# EAGLE board relaym11.7 (EAGLE 5.06)
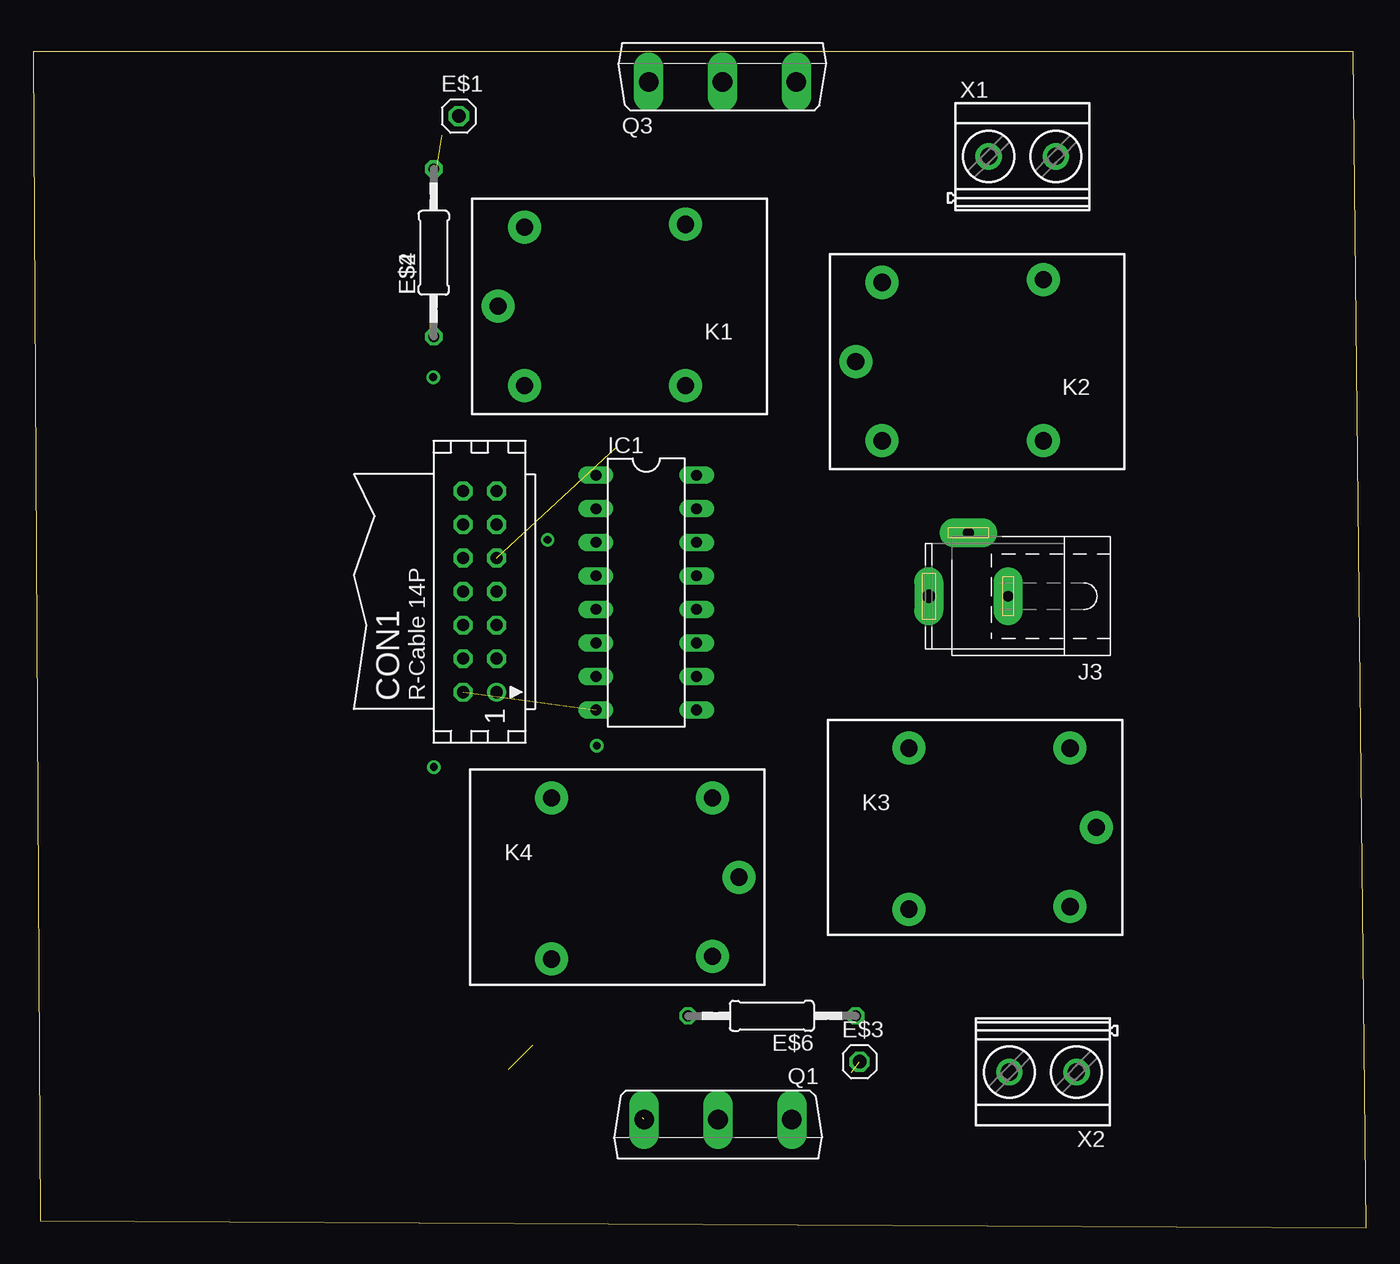
[diagram p0: board, top side]
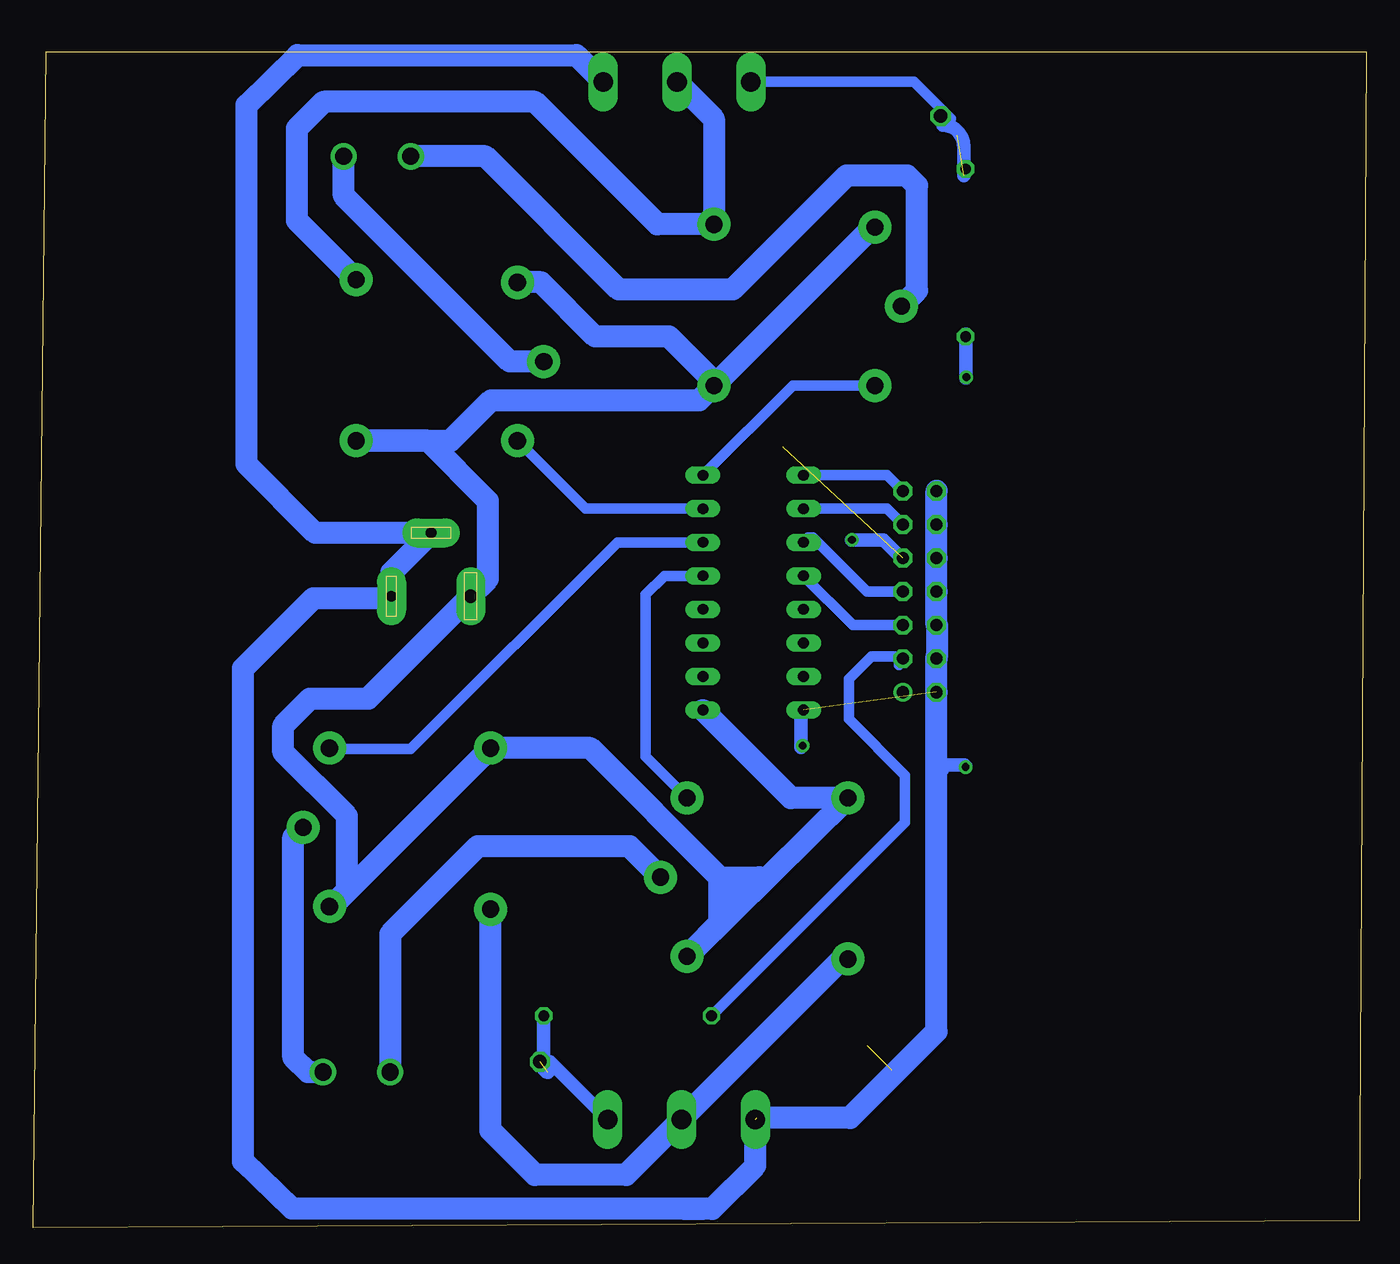
[diagram p1: board, bottom side, seen from below]

Size 101 x 89.08 mm. Coordinates in mm from the lower left corner, seen from the top.
Outline: 0.54,0.54 101,0 100,89.08 0,89.08 0.54,0.54
Copper layers (1*16): Top 0.035mm / dielectric 1.5mm / Bottom 0.035mm
Design rules "default": minimum track width 10mil, minimum drill 24mil, track to track 8mil, track to pad 8mil, pad to pad 8mil, via to via 8mil, smd to smd 8mil, copper to edge 40mil, drill to drill 8mil, minimum pad ring 10mil, minimum via ring 8mil, stop-mask expansion 4mil, vias tented up to drill 0mil, thermal gap 10mil

## Footprints (pad centres in the part's own frame; a part is rotated, then mirrored left to right if it is on the bottom)
CON14 = drill 0.914 round: 1 -7.62,-1.27 | drill 0.914 octagon: 2 -7.62,1.27; 3 -5.08,-1.27; 4 -5.08,1.27; 5 -2.54,-1.27; 6 -2.54,1.27; 7 0,-1.27; 8 0,1.27; 9 2.54,-1.27; 10 2.54,1.27; 11 5.08,-1.27; 12 5.08,1.27; 13 7.62,-1.27; 14 7.62,1.27
1X01 = drill 1.016 octagon: 1 0,0
0207/12 = drill 0.813 octagon: 1 -6.35,0; 2 6.35,0
DIL16 = drill 0.813 long: 1 -8.89,-3.81; 2 -6.35,-3.81; 3 -3.81,-3.81; 4 -1.27,-3.81; 5 1.27,-3.81; 6 3.81,-3.81; 7 6.35,-3.81; 8 8.89,-3.81; 9 8.89,3.81; 10 6.35,3.81; 11 3.81,3.81; 12 1.27,3.81; 13 -1.27,3.81; 14 -3.81,3.81; 15 -6.35,3.81; 16 -8.89,3.81
SPC4077 = drill 0.8 pad 2.184 long: 1 -3,0; 2 0,-4.8 | drill 1 pad 2.184 long: 3 3,0
ZN5 = drill 1.3 pad 2.5 round: 11 8.89,0; 12 -5.31,-6.2; 14 -5.31,6; A1 6.89,6; A2 6.89,-6
TO247BV = drill 1.499 long: D 0,-2.921; G -5.588,-2.921; S 5.588,-2.921
MKDSN1,5/2-5,08 = drill 1.3 pad 2 round: 1 -2.561,0.025; 2 2.519,0.025

## Placement (x,y rotation side)
CON1  [CON14]  33.84,48.18 90 top
E$1  [1X01]  32.25,84.2 0 top
E$2  [0207/12]  30.35,73.84 90 top
E$3  [1X01]  62.6,12.56 0 top
E$4  [0207/12]  30.35,73.84 90 top
E$6  [0207/12]  55.96,16.04 180 top
IC1  ULN2003AN  [DIL16]  46.45,48.1 270 top
J3  jack  [SPC4077]  70.85,47.83 180 top
K1  ZNS5136  [ZN5]  44.11,69.79 180 top
K2  ZNS5136  [ZN5]  71.21,65.6 180 top
K3  ZNS5136  [ZN5]  71.66,30.32 0 top
K4  ZNS5136  [ZN5]  44.58,26.54 0 top
Q1  IRFP240  [TO247BV]  51.88,5.27 180 top
Q3  IRFP240  [TO247BV]  52.22,89.71 0 top
X1  [MKDSN1,5/2-5,08]  74.95,81.12 0 top
X2  [MKDSN1,5/2-5,08]  76.47,11.81 180 top

## Library data of the parts
CON1 = con-harting
E$1 E$3 = pinhead
E$2 E$4 E$6 = rcl
IC1 = uln-udn
J3 = con-jack
K1-K4 = relay
Q1 Q3 = transistor-power
X1 X2 = con-phoenix-508

## Nets
N$1: K1.11 X1.1
N$2: IC1.16 K1.A1
N$3: K2.11 X1.2
N$4: IC1.15 K2.A1
N$5: K3.11 X2.1
N$6: IC1.9 J3.3 K1.14 K1.A2 K2.14 K2.A2 K3.14 K3.A2 K4.14 K4.A2
N$7: CON1.13 IC1.1
N$8: K4.11 X2.2
N$9: CON1.11 IC1.2
N$10: CON1.7 IC1.3
N$11: IC1.14 K3.A1
N$12: IC1.13 K4.A1
N$13: CON1.3 E$6.2
N$15: K3.12 K4.12 Q1.D
N$17: CON1.2 CON1.4 CON1.6 CON1.8 CON1.10 CON1.12 CON1.14 IC1.8 J3.1 J3.2 Q1.S Q3.S
N$18: CON1.5 IC1.4
N$19: K1.12 K2.12 Q3.D
N$26: Q3.G
S$1: E$3.1 E$6.1 Q1.G
S$10: CON1.9

## Tracks (layer width: path | path; a pad name or v marks a point on that pad's centre or on a via)
N$1
  Bottom 1.676: K1.11 34.04,70.98 34.04,78.93 34.8,79.69 39.37,79.69 48.01,71.06 56.64,71.06 66.73,81.15 X1.1
N$2
  Bottom 0.813: IC1.16 43.46,63.79 K1.A1
N$3
  Bottom 1.676: K2.11 64.9,65.6 77.47,78.17 X1.2
N$4
  Bottom 0.813: IC1.15 59.17,54.45 K2.A1
N$5
  Bottom 1.676: K3.11 81.28,29.59 81.28,12.89 80.17,11.79 X2.1
N$6
  Bottom 1.676: K4.A2 51.02,20.98 | 51.02,20.98 K4.14 43.59,32.54 IC1.9 | 51.02,20.98 51.05,21.02 49,23.07 49,26.54 | 64.52,71.6 K2.A2 62.52,71.6 58.42,67.5 52.83,67.5 49.42,64.09 K1.14 | K1.A2 37.42,75.79 K1.14 | K1.14 50.54,62.67 66.29,62.67 69.37,59.6 K2.14 71.09,59.6 66.55,55.05 66.55,49.13 J3.3 75.61,40.07 80.01,40.07 82.04,38.04 82.04,36 77.22,31.18 77.22,25.59 78.49,24.32 K3.A2 78.35,24.32 K3.14 58.78,36.32 49,26.54 | 49,26.54 48,25.54 | 49,26.54 46,26.54
N$7
  Bottom 0.813: CON1.13 36.31,56.99 IC1.1
N$8
  Bottom 1.676: K4.11 55.82,28.89 67.31,28.89 73.95,22.25 X2.2
N$9
  Bottom 0.813: CON1.11 36.31,54.45 IC1.2
N$10
  Bottom 0.813: CON1.7 37.83,48.18 41.91,52.26 42.29,52.26 IC1.3
N$11
  Bottom 0.813: IC1.14 56.74,51.91 72.39,36.26 78.49,36.26 K3.A1
N$12
  Bottom 0.813: IC1.13 53.18,49.37 54.61,47.94 54.61,35.68 K4.A1
N$13
  Bottom 0.813: CON1.3 35.41,43.1 | 35.41,43.1 35.41,42.63 | 35.41,43.1 35.41,43.27 37.49,43.27 39.22,41.54 39.22,38.52 34.95,34.25 34.95,30.7 E$6.2
N$15
  Bottom 1.676: K3.12 66.35,7.36 62.99,4 56.07,4 Q1.D 39.73,20.34 K4.12
N$17  (2 unrouted)
  Bottom 1.676: CON1.14 CON1.12 CON1.10 CON1.8 CON1.6 32.51,45.58 32.51,43.37 32.57,43.31 CON1.4 CON1.2 32.57,14.86 39.12,8.32 46.16,8.32 | 51.67,1.45 50.15,1.45 | 51.67,1.45 81.39,1.45 85.09,5.02 85.09,42.35 79.76,47.69 73.99,47.69 J3.1 73.85,49.63 J3.2 79.62,52.63 84.84,57.85 84.84,85.03 80.96,88.81 59.84,88.81 Q3.S | Q1.S 46.29,4.69 49.56,1.43 51.64,1.43 51.67,1.45
N$18
  Bottom 0.813: CON1.5 38.91,45.64 IC1.4
N$19
  Bottom 1.676: K2.12 81.03,76.31 81.03,83.25 78.99,85.28 62.99,85.28 53.7,75.99 K1.12 49.42,83.99 Q3.D
N$26  (1 unrouted)
  Bottom 0.813: Q3.G 34.27,86.78 31.47,83.98 31.6,83.98 32.08,83.5
  Bottom 1.016: 32.08,83.5 arc90 30.5,81.93 30.5,79.69
S$1  (1 unrouted)
  Bottom 1.016: E$6.1 62.31,12.11 arc-90 61.98,11.77 | E$3.1 61.84,12.57 Q1.G
S$2  (via drill 0.6)
  other vias: 38.97,52.1
S$4  (via drill 0.6)
  other vias: 30.31,64.41
S$5  (via drill 0.6)
  other vias: 42.7,36.5
S$6  (via drill 0.6)
  other vias: 30.36,34.88
S$7
  Bottom 1.016: 42.7,39.01 42.83,38.88 42.83,36.37
S$8  (1 unrouted)
  Bottom 1.016: 35.98,11.96 35.98,11.42
S$9
  Bottom 1.016: 35.19,50.7 36.59,52.1 39.01,52.1
S$10  (1 unrouted)
S$11
  Bottom 1.016: 30.35,64.35 30.35,67.68
S$12
  Bottom 1.016: 30.35,34.89 arc-90 30.5,35.04 32.56,35.04
  Bottom 1.27: 32.56,35.04 arc90 32.26,34.73